# Altium PCB main.PcbDoc (part 1 of 2)
Units mm, origin at the board's own origin, x right, y up, seen from the top; angles counter-clockwise.
Board outline 137 x 49 mm, 4 copper layers (Top Layer, Layer 1, Layer 2, Bottom Layer), stack 0.569 mm thick; 68 components, 75 nets, 388 pads, 316 vias.
Unrouted connection lines stored in the file: 6.
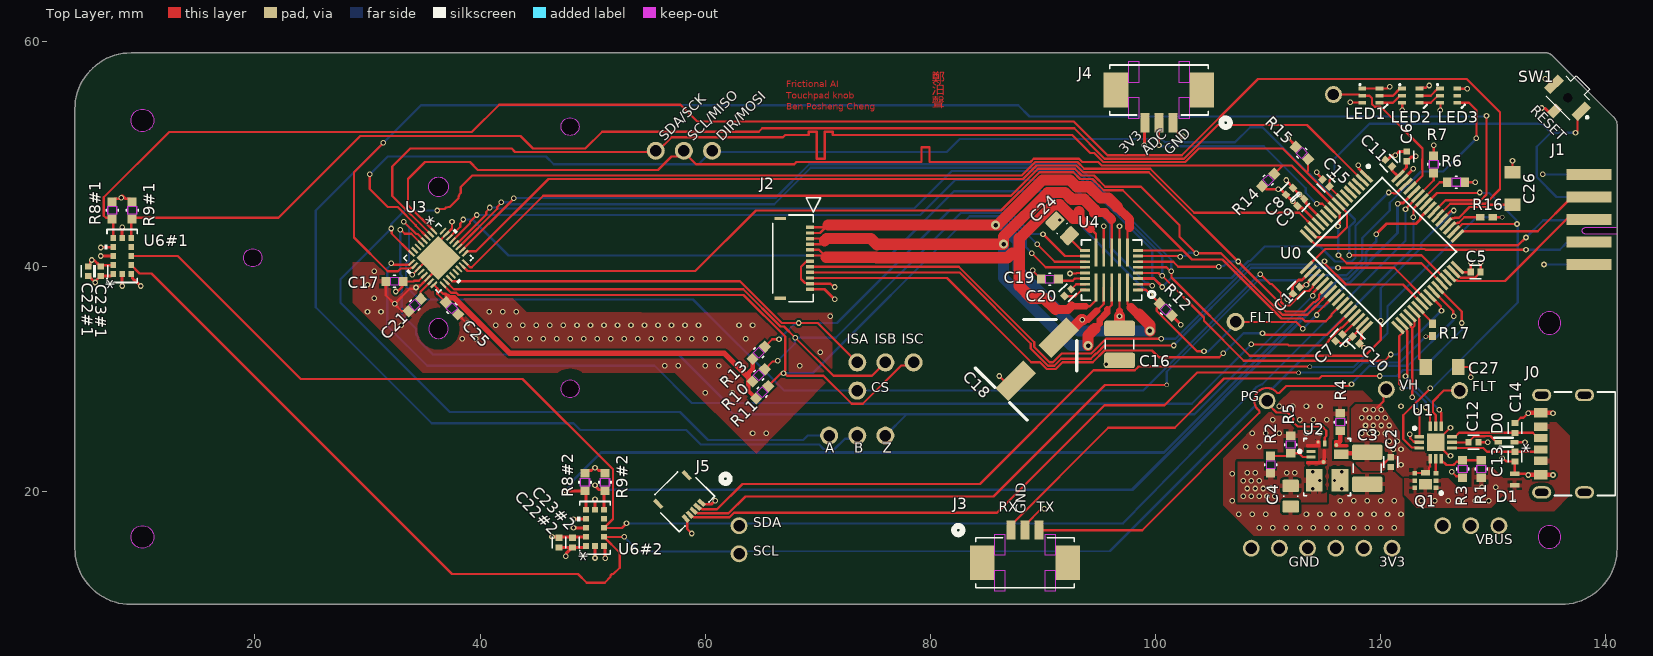
[diagram p0: Top Layer view]
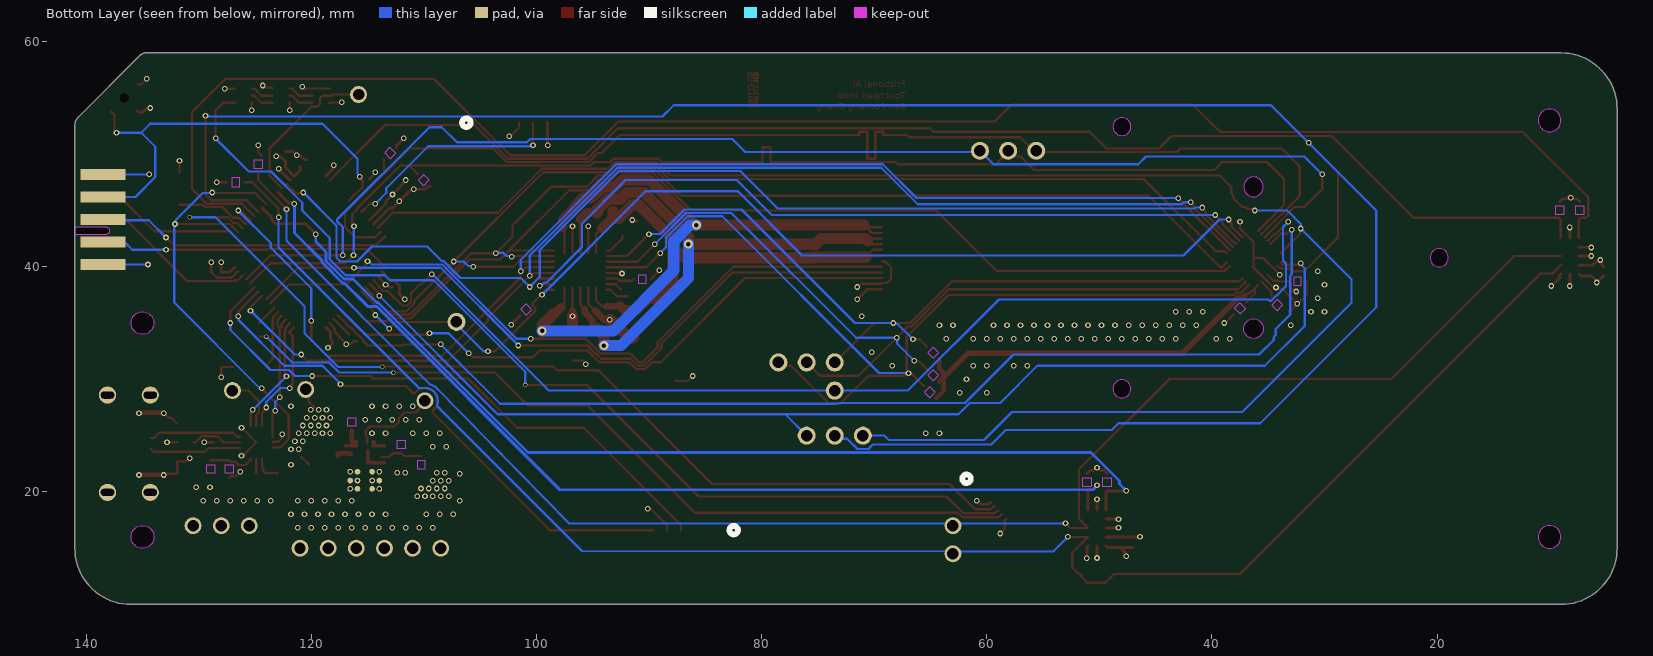
[diagram p1: Bottom Layer view, seen from below]
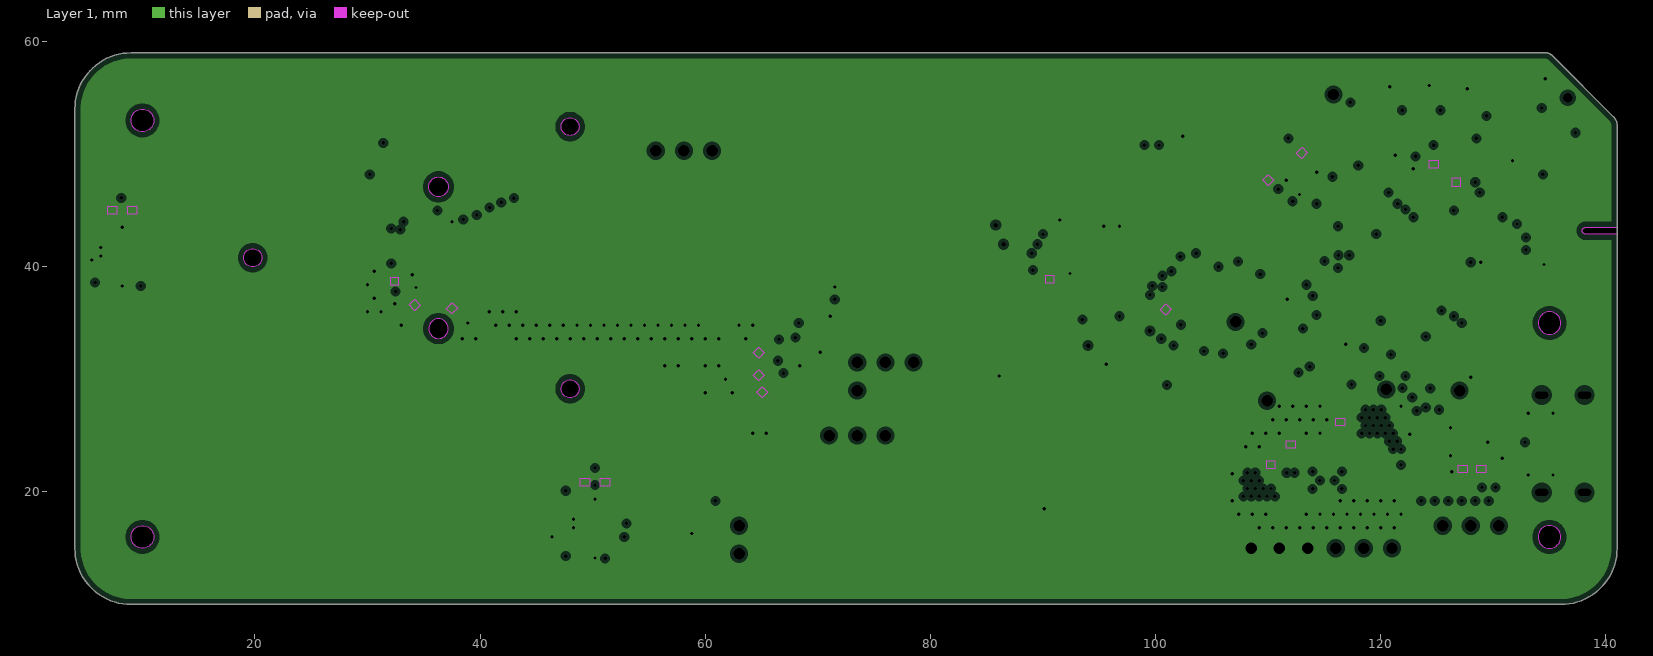
[diagram p2: Layer 1, clearances drawn from the general rule]
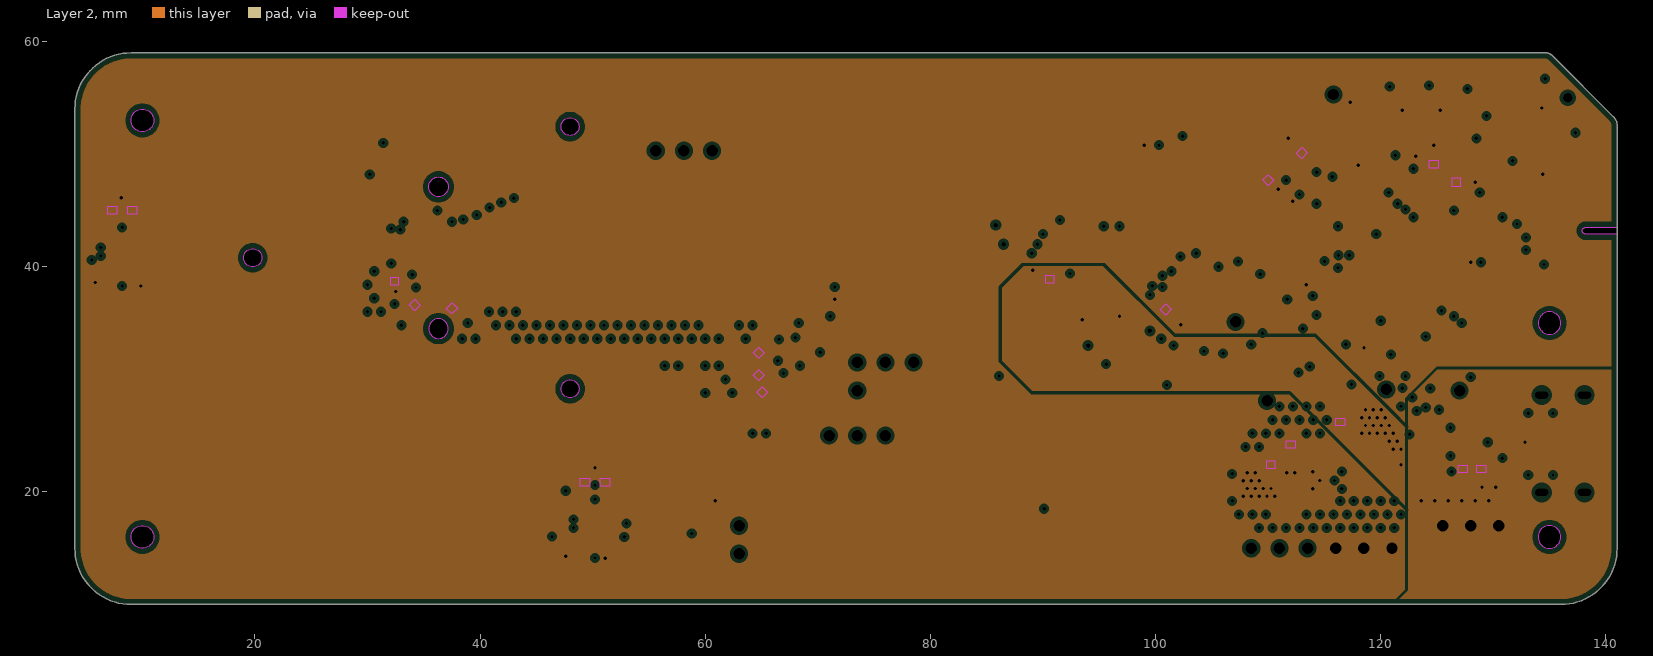
[diagram p3: Layer 2, clearances drawn from the general rule]
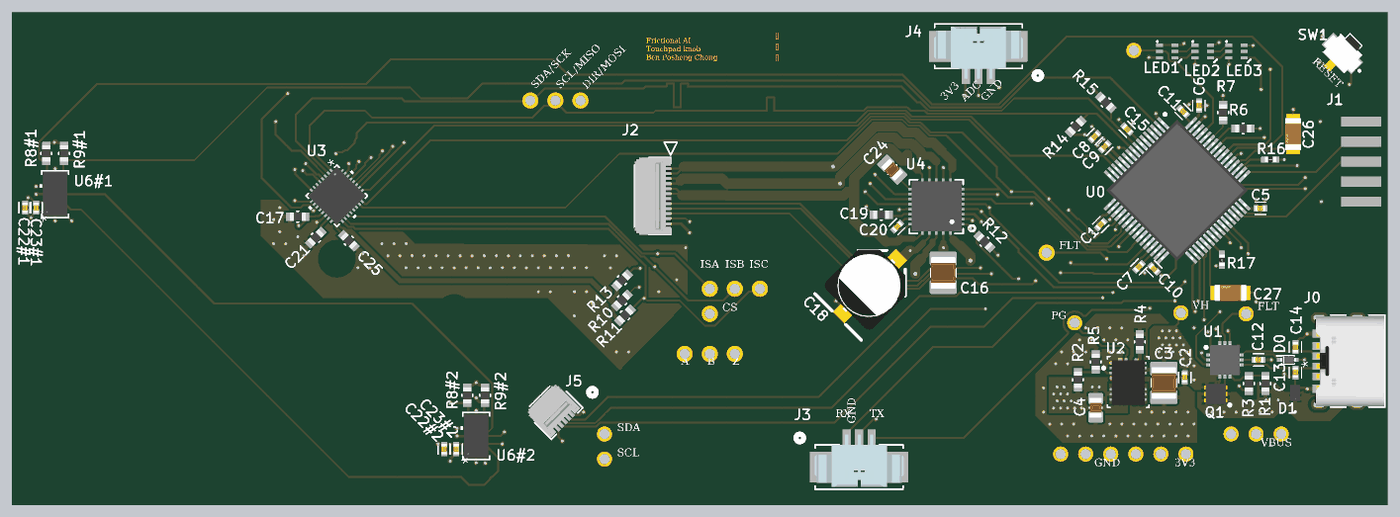
[diagram p5: 3D render of the assembled board from above, using the file's embedded part models]

## Layer stack, top to bottom
Top Solder: solder mask 0.0102, Solder Resist, Dk 3.5
Top Layer: signal copper 0.0356
Dielectric 2: prepreg 0.0711, PP-006, Dk 4.1
Layer 1: plane copper 0.018, net GND
Dielectric 1: dielectric 0.32, FR-4, Dk 4.8
Layer 2: plane copper 0.018, net (Multiple Nets)
Dielectric 5: prepreg 0.0711, PP-006, Dk 4.1
Bottom Layer: signal copper 0.0356
Bottom Solder: solder mask 0.0102, Solder Resist, Dk 3.5

## Board outline
9,10 136,10 ccw(c136,15) 141,15 141,52.559 ccw(c139.934,52.559) 140.688,53.312 135.241,58.759 ccw(c134.659,58.176) 134.659,59 9,59 ccw(c9,54) 4,54 4,15 ccw(c9,15)
cut-out: 36.3,46.225 cw(c36.3,47.1) 35.425,47.1 cw(c36.3,47.1) 36.3,47.975 cw(c36.3,47.1) 37.175,47.1 cw(c36.3,47.1)
cut-out: 35.425,34.5 ccw(c36.3,34.5) 36.3,33.625 ccw(c36.3,34.5) 37.175,34.5 ccw(c36.3,34.5) 36.3,35.375 ccw(c36.3,34.5)
cut-out: 10,52 cw(c10,53) 9,53 cw(c10,53) 10,54 cw(c10,53) 11,53 cw(c10,53)
cut-out: 10,15 cw(c10,16) 9,16 cw(c10,16) 10,17 cw(c10,16) 11,16 cw(c10,16)
cut-out: 133.981,15.996 ccw(c134.986,15.996) 134.986,14.991 ccw(c134.986,15.996) 135.991,15.996 ccw(c134.986,15.996) 134.986,17.001 ccw(c134.986,15.996)
cut-out: 134,35 ccw(c135,35) 135,34 ccw(c135,35) 136,35 ccw(c135,35) 135,36 ccw(c135,35)
cut-out: 47.992,28.358 cw(c47.992,29.158) 47.192,29.158 cw(c47.992,29.158) 47.992,29.958 cw(c47.992,29.158) 48.792,29.158 cw(c47.992,29.158)
cut-out: 19.8,40 cw(c19.8,40.8) 19,40.8 cw(c19.8,40.8) 19.8,41.6 cw(c19.8,40.8) 20.6,40.8 cw(c19.8,40.8)
cut-out: 47.988,51.649 cw(c47.988,52.449) 47.188,52.449 cw(c47.988,52.449) 47.988,53.249 cw(c47.988,52.449) 48.788,52.449 cw(c47.988,52.449)

## Design rules (kind name [scope] priority, off if disabled: settings)
BoardOutlineClearance [All] p1: gap=1 ignorepadtopadclearanceinfootprint=FALSE
Clearance [All] p1: gap=0.2 ignorepadtopadclearanceinfootprint=TRUE except(0.1: Track-Track Track-SMDPad; 0.15: SMDPad-SMDPad; 0.28: Track-THPad Track-Hole; 0.3: THPad-Fill THPad-Poly THPad-Region; 0.45: THPad-THPad)
HoleSize [All] p1: absolutevalues=TRUE maxlimit=6.3 minlimit=0.15 maxpercent=80.000 minpercent=20.000
MatchedLengths I2C2 [InNetClass('i2c2')] p1: tolerance=8 checknetsindiffpair=FALSE checkdiffpairvsdiffpair=TRUE checkxsignals=TRUE checkothers=TRUE
MatchedLengths I2C3 [InNetClass('i2c3/spi1')] p2: tolerance=8 checknetsindiffpair=FALSE checkdiffpairvsdiffpair=TRUE checkxsignals=TRUE checkothers=TRUE
MatchedLengths USART [InNetClass('usart')] p3: tolerance=8 checknetsindiffpair=FALSE checkdiffpairvsdiffpair=TRUE checkxsignals=TRUE checkothers=TRUE
MinimumAnnularRing [not isvia] p1: minimumring=0.2
MinimumSolderMaskSliver [All] p1: minsoldermaskwidth=0.1
PlaneClearance [All] p1: clearance=0.3
PlaneConnect [All] p1: pad.planeconnectstyle=Relief pad.reliefexpansion=0.2 pad.reliefentries=4 pad.reliefconductorwidth=0.3 pad.reliefairgap=0.3 via.planeconnectstyle=Direct via.reliefexpansion=0.508 via.reliefentries=4 via.reliefconductorwidth=0.254 via.reliefairgap=0.254
PolygonConnect PolygonConnect_PWR [InNet('VBUS') or InNet('VH') or InNet('GND')] p1: thpad.connectstyle=Relief thpad.reliefconductorwidth=0.254 thpad.reliefentries=4 thpad.polygonreliefangle="90 Angle" thpad.airgapwidth=0.254 smdpad.connectstyle=Relief smdpad.reliefconductorwidth=0.4 smdpad.reliefentries=4 smdpad.polygonreliefangle="90 Angle" smdpad.airgapwidth=0.2 via.connectstyle=Direct via.reliefconductorwidth=0.254 via.reliefentries=4 via.polygonreliefangle="90 Angle" via.airgapwidth=0.254
PolygonConnect PolygonConnect_3V3 [InNet('3V3')] p2: thpad.connectstyle=Relief thpad.reliefconductorwidth=0.254 thpad.reliefentries=4 thpad.polygonreliefangle="90 Angle" thpad.airgapwidth=0.254 smdpad.connectstyle=Relief smdpad.reliefconductorwidth=0.45 smdpad.reliefentries=4 smdpad.polygonreliefangle="45 Angle" smdpad.airgapwidth=0.2 smdpad.conductorbypadedge=TRUE smdpad.mindistance=0.381 smdpad.enablemindistance=FALSE via.connectstyle=Direct via.reliefconductorwidth=0.254 via.reliefentries=4 via.polygonreliefangle="90 Angle" via.airgapwidth=0.254
PolygonConnect [All] p3: thpad.connectstyle=Relief thpad.reliefconductorwidth=0.254 thpad.reliefentries=4 thpad.polygonreliefangle="90 Angle" thpad.airgapwidth=0.254 smdpad.connectstyle=Relief smdpad.reliefconductorwidth=0.254 smdpad.reliefentries=4 smdpad.polygonreliefangle="90 Angle" smdpad.airgapwidth=0.254 smdpad.conductorbypadedge=TRUE smdpad.mindistance=0.381 smdpad.enablemindistance=FALSE via.connectstyle=Direct via.reliefconductorwidth=0.254 via.reliefentries=4 via.polygonreliefangle="90 Angle" via.airgapwidth=0.254
RoomDefinition bldc [InComponentClass('bldc')] p1: confinementstyle=ConfineIn formatcopy=TRUE lockcomponents=FALSE outline 30.66,37.709 30.66,39.691 31.535,39.691 31.535,45.544 64.413,45.544 64.413,46.454 108.069,46.454 108.069,49.631 111.069,49.631 111.069,52.031 114.931,52.031 114.931,48.169 111.931,48.169 111.931,45.769 102.831,45.769 102.831,34.269 98.689,34.269 98.689,30.466 95.365,30.466 95.365,25.81 83.411,25.81 83.411,26.921 63.118,26.921 63.118,28.421 62.818,28.421 62.818,34.369 35.569,34.369 35.569,34.669 32.269,34.669 32.269,36.389 31.535,36.389 31.535,37.709
RoomDefinition power [InComponentClass('power')] p2: confinementstyle=ConfineIn formatcopy=TRUE lockcomponents=FALSE outline 106.8,15.7 141.732,15.7 141.732,59.817 106.8,59.817
RoomDefinition TOF1 [InComponentClass('TOF1')] p3: confinementstyle=ConfineIn formatcopy=TRUE lockcomponents=FALSE outline 6.295,36.126 10.105,36.126 10.105,46.794 6.295,46.794
RoomDefinition TOF2 [InComponentClass('TOF2')] p4: confinementstyle=ConfineIn formatcopy=TRUE lockcomponents=FALSE outline 48.295,11.974 52.105,11.974 52.105,22.642 48.295,22.642
RoutingVias [All] p1: holewidth=0.3 width=0.5 viastyle="Through Hole" minholewidth=0.15 minwidth=0.25 maxholewidth=0.711 maxwidth=1.27
SilkToSilkClearance [All] p1: silktosilkclearance=0
SilkToSolderMaskClearance [IsPad] p1: minsilkscreentomaskgap=0.15 clearancetoexposedcopper=FALSE
SolderMaskExpansion SolderMaskExpansionVia [IsVia] p1: expansion=0 istentingtop=TRUE
SolderMaskExpansion [All] p2: expansion=0 istentingtop=FALSE
SupplyNets "Schematic Supply Nets_3" [InNet('3V3')] p1: voltage=0.000
SupplyNets "Schematic Supply Nets_2" [InNet('VH')] p2: voltage=0.000
SupplyNets "Schematic Supply Nets_1" [InNet('VBUS')] p3: voltage=0.000
SupplyNets "Schematic Supply Nets" [InNet('GND')] p4: voltage=0.000
Width [All] p1: maxlimit=1 minlimit=0.1 preferedwidth=0.2
24 further rules are at their usual default settings.

## Classes and differential pairs
net class i2c3/spi1: MOSI SCL/SCK SDA/MISO
net class i2c2: SCL SDA
net class usart: RX TX
channel class tof: tof1 tof2
component class tof2: C22#2 C23#2 R8#2 R9#2 U6#2
component class tof1: C22#1 C23#1 R8#1 R9#1 U6#1
component class main: C26 C27 J3 J4 J5 R6 R7 R16 R17 U0
component class POWER: C1 C2 C3 C4 C5 C6 C7 C8 C9 C10 C11 C12 C13 C14 C15 D0 D1 J0 J1 LED1 LED2 LED3 Q1 R1 R2 R3 R4 R5 SW1 U1
component class bldc: C16 C17 C18 C19 C20 C21 C24 C25 J2 R10 R11 R12 R13 R14 R15 U3 U4

## Components (designator, comment, footprint, x,y, rotation, side; value= is the part's Value field where it differs from the comment)
C1 "100n" CAPC1005X55N 112.5,37.9 r45 top locked
C2 "100n" CAPC1005X55N 120.879,22.649 r90 top
C3 "10u" CAPC3225X270N 118.8,22.1 r90 top
C4 "47u" CAPC2012X145N 111.999,19.623 r90 top
C5 "100n" CAPC1005X55N 128.423,39.53 r180 top
C6 "100n" CAPC1005X55N 122.3,49.8 r270 top
C7 "4.7u" CAPC1005X55N 116.299,33.693 r45 top
C8 "100n" CAPC1005X55N 111.9,46.7 r225 top
C9 "1u" CAPC1005X55N 112.9,45.7 r225 top
C10 "100n" CAPC1005X55N 117.8,33.5 r315 top
C11 "10u" CAPC1005X55N 120.704,49.196 r315 top
C12 "100n" CAPC1005X55N 128.237,24.407 r180 top
C13 "330p" CAPC1005X55N 131.92,23.137 r90 top
C14 "330p" CAPC1005X55N 131.92,25.677 r270 top
C15 "100n" CAPC1005X55N 115.132,47.432 r315 top
C16 "22u" CAPC3225X270N 96.8,33.1 r270 top
C17 "1u" RC0603N_YAG 32.4,38.7 r0 top
C18 "100u" NICHICON63 85.779,29.21 r315 top
C19 "1u" RC0603N_YAG 90.6,38.9 r180 top
C20 "100n" CAPC1005X55N 92.2,37.7 r45 top
C21 "1u" RC0603N_YAG 34.2,36.6 r45 top
C22#1 "4.7u" CAPC1005X55N 5.2,39.6 r270 top (schematic designator C22)
C22#2 "4.7u" CAPC1005X55N 47,15.5 r270 top (schematic designator C22)
C23#1 "100n" CAPC1005X55N 6.3,39.6 r270 top (schematic designator C23)
C23#2 "100n" CAPC1005X55N 48.2,15.5 r270 top (schematic designator C23)
C24 "4.7u" CAPC2012X145N 91.7,43.4 r135 top
C25 "1u" RC0603N_YAG 37.5,36.3 r135 top
C26 "47n" 3216M/1206 131,48.95 r270 top
C27 "47n" 3216M/1206 127.45,31.8 r180 top
D0 "BAT54KFILM" SODFL1608X70N 131.158,24.407 r0 top
D1 "ESDA25P35-1U1M" QFN1610_STM 131.9,21.1 r90 top
J0 "2171750001" 2171750001_MOL 137.254,24.28 r90 top
J1 "STLINKV3MINIE" 009159010061911 135,49.2 r270 top
J2 "5034801200" CON_5034801200_MOL 67.8,40.75 r270 top
J3 "532610371" CONN_532610001-SD_03_MOL 88.4,13.7 r180 top
J4 "532610371" CONN_532610001-SD_03_MOL 100.3,55.7 r0 top
J5 "5034800540" CONN_503480-0540_MOL 57.9,19.4 r225 top
LED1 "WS2816A-2121" WS2816A-2121 118.01,52.83 r0 top
LED2 "WS2816A-2121" WS2816A-2121 121.55,52.83 r0 top
LED3 "WS2816A-2121" WS2816A-2121 124.91,52.83 r0 top
Q1 "DMT35M4LFDF" "U-DFN2020-6 (TYPE F)" 125.11,20.15 r90 top
R1 "10k" RC0603N_YAG 128.928,22.036 r90 top
R2 "45.3k" RC0603N_YAG 110.221,22.417 r90 top
R3 "475" RC0603N_YAG 127.277,22.036 r270 top
R4 "18k" RC0603N_YAG 116.4,26.2 r90 top
R5 "10k" RC0603N_YAG 112,24.2 r90 top
R6 "1.5k" RC0603N_YAG 126.7,47.5 r180 top
R7 "1.5k" RC0603N_YAG 124.7,49.1 r270 top
R8#1 "10k" RC0603N_YAG 7.311,45.016 r270 top (schematic designator R8)
R8#2 "10k" RC0603N_YAG 49.311,20.864 r270 top (schematic designator R8)
R9#1 "10k" RC0603N_YAG 9.089,45.016 r270 top (schematic designator R9)
R9#2 "10k" RC0603N_YAG 51.089,20.864 r270 top (schematic designator R9)
R10 "2.15k" RC0603N_YAG 64.749,30.351 r225 top
R11 "2.15k" RC0603N_YAG 65.049,28.851 r225 top
R12 "1.5k" RC0603N_YAG 100.9,36.2 r135 top
R13 "2.15k" RC0603N_YAG 64.749,32.351 r225 top
R14 "1.5k" RC0603N_YAG 110,47.7 r45 top
R15 "1.5k" RC0603N_YAG 113,50.1 r315 top
R16 "10k" RESC1005X35N 129.4,44.4 r180 top
R17 "10k" RESC1005X35N 124.6,34.4 r90 top
SW1 "B3U-3100P-B" B3U3000PB 136.598,55.002 r315 top
U0 "STM32U575RGT3" QFP50P1200X1200X160-64N 120.124,41.329 r315 top locked
U1 "TCPP01-M12" QFN50P300X300X100-13N-D 124.882,24.399 r0 top
U2 "TPSM84338RCJR" ? 115.245,22.121 r0 top
U3 "MP6570GR-xxxx-P" QFN-32_MP6570_MNP 36.297,40.783 r315 top
U4 "MP6540GU-P" QFN-5x5_MP6540_MNP 96.1,39.7 r180 top
U6#1 "VL53L0CXV0DH/1" LGA12_STM 8.2,40.952 r90 top (schematic designator U6)
U6#2 "VL53L0CXV0DH/1" LGA12_STM 50.2,16.8 r90 top (schematic designator U6)

## Footprints (in the part's own frame and the unit in brackets; to place one, negate y for a bottom-side part, rotate by r counter-clockwise, add the part's x,y. Pads: shape width x height; smd on the part's side, far side on the other; paste and mask are expansions set on the pad)
3216M/1206 [mm]
  rect 1.1x1.4 / inner round 0 / far side round 0 all layers, no hole: 1(0.55,0.7) 2(3.45,0.7)
  body extent 0.4,-0.1 3.6,1.5, height 0.95
2171750001_MOL [mil]
  oval 43x67 / inner oval 43x67 / far side round 60 hole 47 slot 24 at 0 deg paste-99999 mask-33.5: 7(-170.08,116.31) 8(170.08,116.31) 9(-170.08,-33.29) 10(170.08,-33.29)
  rect 28x47 smd paste+0 mask+0: A5(-19.68,119.46) B5(19.69,119.46)
  rect 30x47 smd paste+0 mask+0: A9(59.84,119.46) B9(-59.84,119.46)
  rect 32x47 smd paste+0 mask+0: A12(108.27,119.46) B12(-108.27,119.46)
  silkscreen extent -181,-141 181,71, body extent -176,-139 176,133, height 125
009159010061911 [mm]
  rect 1x4 smd: 1(9,3.5) 2(7,3.5) 3(5,3.5) 4(3,3.5) 5(1,3.5)
  rect 1x4 smd far side: 6(9,3.5) 7(7,3.5) 8(5,3.5) 9(3,3.5) 10(1,3.5)
  Keep-Out Layer board cut-out: 5.7,6 6.3,6 6.3,3.2 6.27,3.07 6.187,2.965 6.067,2.908 5.933,2.908 5.813,2.965 5.73,3.07 5.7,3.2 5.7,3.2
B3U3000PB [mm]
  rect 0.8x1.7 smd: 1(1.7,0) 2(-1.7,0)
  rect 0.8x1.1 / inner round 0 / far side round 0 all layers, no hole: 3(0,-1.65)
  round 0.425 hole 0.85 unplated: 4(0,0)
  silkscreen extent -1.5,-1.25 2.55,1.95, body extent -1.97,-1.3 2.03,1.91, height 1.2
CAPC1005X55N [mm]
  rect 0.54x0.6 smd: 1(-0.43,0) 2(0.43,0)
  silkscreen extent -0.53,-0.62 0.53,0.62, body extent -0.51,-0.28 0.54,0.28, height 0.56
CAPC2012X145N [mm]
  rrect25% 1.1x1.48 smd: 1(-0.915,0) 2(0.915,0)
  silkscreen extent -0.05,-0.63 0.05,0.63, body extent -1,-0.63 1,0.63, height 1.45
CAPC3225X270N [mm]
  rrect25% 1.37x2.72 smd: 1(-1.42,0) 2(1.42,0)
  silkscreen extent -0.42,-1.25 0.42,1.25, body extent -1.6,-1.25 1.6,1.25, height 2.7
CON_5034801200_MOL [mm]
  rect 0.3x0.7 smd paste+0 mask+0.076: 1(-2.75,1.5) 2(-2.25,1.5) 3(-1.75,1.5) 4(-1.25,1.5) 5(-0.75,1.5) 6(-0.25,1.5) 7(0.25,1.5) 8(0.75,1.5) 9(1.25,1.5) 10(1.75,1.5) 11(2.25,1.5) 12(2.75,1.5)
  rect 0.3x1 smd paste+0 mask+0.076: P1(-3.54,-1.15) P2(3.54,-1.15)
  silkscreen extent -5.37,-1.8 3.85,2.43, body extent -3.85,-1.78 3.85,1.82, height 1.85
CONN_503480-0540_MOL [mil]
  rect 14x30 smd paste+0 mask+0: 1(-39.37,59.19) 2(-19.69,59.19) 3(0,59.19) 4(19.69,59.19) 5(39.37,59.19)
  rect 14x41 smd: 6(-70.47,-45.14) 7(70.47,-45.14)
  silkscreen extent -172,-76 88,76, body extent -80,-71 85,71, height 73
CONN_532610001-SD_03_MOL [mil]
  rect 32x67 smd paste+0 mask+0: 1(49.21,-114.35) 2(0,-114.35) 3(-49.21,-114.35)
  rect 87x122 smd paste+0 mask+0: 4(-149.61,-0.18) 5(149.61,-0.18)
  Top Layer keep-out region: 108.08,-27.67 69.08,-27.67 69.08,-98.67 108.08,-98.67
  Top Layer keep-out region: -69.08,-27.67 -108.08,-27.67 -108.08,-98.67 -69.08,-98.67
  Top Layer keep-out region: 108.08,98.32 69.08,98.32 69.08,27.31 108.08,27.31
  Top Layer keep-out region: -69.08,98.31 -108.08,98.31 -108.08,27.31 -69.08,27.31
  silkscreen extent -172,-129 248,88, body extent -175,-127 175,77, height 126
LGA12_STM [mm]
  rect 0.5x0.5 smd paste+0 mask+0: 1(-1.6,0.8) 2(-0.8,0.8) 3(0,0.8) 4(0.8,0.8) 5(1.6,0.8) 6(1.6,0) 7(1.6,-0.8) 8(0.8,-0.8) 9(0,-0.8) 10(-0.8,-0.8) 11(-1.6,-0.8) 12(-1.6,0)
  silkscreen extent -2.35,-1.35 2.35,1.56, body extent -2.22,-1.22 2.22,1.22, height 1.04
NICHICON63 [mm]
  rect 1.6x3.5 / inner rect 0x0 / far side rect 0x0 all layers, no hole: 1(0.8,1.75) 2(0.8,7.15)
  silkscreen extent -2.54,0 4,8.13, body extent -2.6,0.9 4,7.9, height 5.67
QFN50P300X300X100-13N-D [mm]
  rect 0.85x0.3 smd: 1(-1.45,0.5) 2(-1.45,0) 3(-1.45,-0.5) 7(1.45,-0.5) 8(1.45,0) 9(1.45,0.5)
  rect 0.3x0.85 smd: 4(-0.5,-1.45) 5(0,-1.45) 6(0.5,-1.45) 10(0.5,1.45) 11(0,1.45) 12(-0.5,1.45)
  rect 1.55x1.55 smd: 13(0,0)
  silkscreen extent -2,1.13 -1.75,1.37, body extent -1.55,-1.55 1.55,1.55, height 1
QFN1610_STM [mil]
  rect 16x33 smd paste+0 mask+0: 1(-20.5,0) 2(20.5,0)
  silkscreen extent -77,-3 -71,3, body extent -31,-19 31,19, height 24
QFN-5x5_MP6540_MNP [mil]
  rect 35x10 smd paste+0 mask+0: 1(-92.52,68.92) 2(-92.52,49.22) 3(-92.52,29.53) 4(-92.52,9.85) 5(-92.52,-9.85) 6(-92.52,-29.54) 7(-92.52,-49.23) 8(-92.52,-68.92) 14(92.52,-68.92) 15(92.52,-49.23) 16(92.52,-29.54) 17(92.52,-9.85) 18(92.52,9.85) 19(92.52,29.53) 20(92.52,49.22) 21(92.52,68.92)
  rect 10x98 smd paste+0 mask+0: 9(-55.13,-61.02) 10(-27.56,-61.02) 11(0,-61.02) 12(27.56,-61.02) 13(55.13,-61.02) 22(55.13,61.02) 23(27.56,61.02) 24(0,61.02) 25(-27.56,61.02) 26(-55.13,61.02)
  silkscreen extent -151,-106 106,106, body extent -100,-100 97,97, height 30
QFN-32_MP6570_MNP [mm]
  rect 0.75x0.204 smd paste+0 mask+0: 1(-1.97,1.4) 2(-1.97,1) 3(-1.97,0.6) 4(-1.97,0.2) 5(-1.97,-0.2) 6(-1.97,-0.6) 7(-1.97,-1) 8(-1.97,-1.4) 17(1.97,-1.4) 18(1.97,-1) 19(1.97,-0.6) 20(1.97,-0.2) 21(1.97,0.2) 22(1.97,0.6) 23(1.97,1) 24(1.97,1.4)
  rect 0.204x0.75 smd paste+0 mask+0: 9(-1.4,-1.97) 10(-1,-1.97) 11(-0.6,-1.97) 12(-0.2,-1.97) 13(0.2,-1.97) 14(0.6,-1.97) 15(1,-1.97) 16(1.4,-1.97) 25(1.4,1.97) 26(1,1.97) 27(0.6,1.97) 28(0.2,1.97) 29(-0.2,1.97) 30(-0.6,1.97) 31(-1,1.97) 32(-1.4,1.97)
  rect 2.794x2.794 smd paste-1.397 mask+0: 33(0,0)
  silkscreen extent -2.17,-2.85 2.85,2.85, body extent -2.05,-2.05 2.05,2.05, height 1
QFP50P1200X1200X160-64N [mm]
  rect 1.475x0.3 smd: 1(-5.738,3.75) 2(-5.738,3.25) 3(-5.738,2.75) 4(-5.738,2.25) 5(-5.738,1.75) 6(-5.738,1.25) 7(-5.738,0.75) 8(-5.738,0.25) 9(-5.738,-0.25) 10(-5.738,-0.75) 11(-5.738,-1.25) 12(-5.738,-1.75) 13(-5.738,-2.25) 14(-5.738,-2.75) 15(-5.738,-3.25) 16(-5.738,-3.75) 33(5.738,-3.75) 34(5.738,-3.25) 35(5.738,-2.75) 36(5.738,-2.25) 37(5.738,-1.75) 38(5.738,-1.25) 39(5.738,-0.75) 40(5.738,-0.25) 41(5.738,0.25) 42(5.738,0.75) 43(5.738,1.25) 44(5.738,1.75) 45(5.738,2.25) 46(5.738,2.75) 47(5.738,3.25) 48(5.738,3.75)
  rect 0.3x1.475 smd: 17(-3.75,-5.738) 18(-3.25,-5.738) 19(-2.75,-5.738) 20(-2.25,-5.738) 21(-1.75,-5.738) 22(-1.25,-5.738) 23(-0.75,-5.738) 24(-0.25,-5.738) 25(0.25,-5.738) 26(0.75,-5.738) 27(1.25,-5.738) 28(1.75,-5.738) 29(2.25,-5.738) 30(2.75,-5.738) 31(3.25,-5.738) 32(3.75,-5.738) 49(3.75,5.738) 50(3.25,5.738) 51(2.75,5.738) 52(2.25,5.738) 53(1.75,5.738) 54(1.25,5.738) 55(0.75,5.738) 56(0.25,5.738) 57(-0.25,5.738) 58(-0.75,5.738) 59(-1.25,5.738) 60(-1.75,5.738) 61(-2.25,5.738) 62(-2.75,5.738) 63(-3.25,5.738) 64(-3.75,5.738)
  silkscreen extent -6.35,-4.65 4.65,4.65, body extent -6,-6 6,6, height 1.6
RC0603N_YAG [mil]
  rect 30x32 smd paste+0 mask+0: 1(-30.5,0) 2(30.5,0)
  Top Layer keep-out region: -13.5,-14 -13.5,14 13.5,14 13.5,-14
  Keep-Out Layer region: -13.5,-14 -13.5,14 13.5,14 13.5,-14
  silkscreen extent -3,-21 3,21, body extent -31,-16 31,16, height 28
RESC1005X35N [mm]
  rect 0.75x0.6 smd: 1(-0.55,0) 2(0.55,0)
  body extent -0.59,-0.28 0.51,0.27, height 0.34
SODFL1608X70N [mm]
  rect 0.7x0.42 smd: 1(-0.725,0) 2(0.725,0)
  silkscreen extent -1.07,-0.4 0.6,0.4, body extent -0.76,-0.4 0.84,0.4, height 0.7
"U-DFN2020-6 (TYPE F)" [mm]
  rect 0.4x0.425 / inner rect 0x0 / far side rect 0x0 all layers, no hole: D(0.2,2.09) D(0.2,0.21) D(0.85,2.09) D(0.85,0.21) G(1.5,0.21) S(1.5,2.09)
  rect 0.95x1.15 / inner rect 0x0 / far side rect 0x0 all layers, no hole mask+0: D(0.52,1.15)
  rect 0.48x0.8 / inner rect 0x0 / far side rect 0x0 all layers, no hole: S(1.54,1.15)
  silkscreen extent -0.38,-0.38 -0.13,-0.13, body extent -0.15,0.15 1.85,2.15, height 0.6
WS2816A-2121 [mm]
  rect 0.7x0.32 smd: 1(0.35,3) 2(0.35,2.37) 3(0.35,1.74) 4(1.89,1.74) 5(1.89,2.37) 6(1.89,3)
  silkscreen extent 0.12,1.27 2.56,3.37
? [mm]
  rect 0.8x0.25 smd paste+0 mask-0.381: 1(-1.45,1.475) 2(-1.45,0.975)
  round 0.348 smd paste-0.161 mask-0.165: 3(-0.319,0.532)
  round 0.5 / inner round 1.524 / far side round 0.5 hole 0.3 paste-2539.97 mask-0.241: 4(-1.3,-1.85) 4(-1.3,-0.325) 4(-0.65,-1.113) 5(0.65,-1.113) 5(1.3,-1.85) 5(1.3,-0.325)
  round 0.5 / inner round 1.524 / far side round 0.5 all layers, no hole paste-2539.97 mask-0.241: 4(-1.3,-1.113) 4(-0.65,-1.85) 4(-0.65,-0.325) 5(0.65,-1.85) 5(0.65,-0.325) 5(1.3,-1.113)
  rect 1.5x2.025 smd paste-1 mask-1.003: 4(-1.15,-1.088) 5(1.15,-1.088)
  rect 1.3x0.85 smd paste-0.637 mask-0.635: 6(1.25,1.225)
  round 0.337 smd paste+0 mask-0.152: 7(0.812,2.037)
  rect 0.3x0.55 smd paste+0 mask-0.267: 8(-0.225,2.175)
  round 0.27 smd paste+0 mask-0.127: 9(-0.8,2.3)
  Top Layer region: 0.675,1.85 1.8,1.85 1.85,1.9 1.85,2.05 1.8,2.1 1.075,2.1 0.975,2.2 0.975,2.4 0.925,2.45 0.675,2.45 0.625,2.4 0.625,1.9
  Top Layer region: -0.675,1.85 -1.8,1.85 -1.85,1.9 -1.85,2.05 -1.8,2.1 -1.075,2.1 -0.975,2.2 -0.975,2.4 -0.925,2.45 -0.675,2.45 -0.625,2.4 -0.625,1.9
  Top Layer region: -0.175,0.326 -1.8,0.325 -1.85,0.375 -1.85,0.55 -1.8,0.6 -0.606,0.6 -0.536,0.63 -0.404,0.761 -0.375,0.832 -0.375,1.6 -0.325,1.65 -0.175,1.65 -0.125,1.6 -0.125,0.376
  silkscreen extent -2.57,-2.47 2.07,2.63, body extent -1.65,-2.25 1.65,2.25, height 2.05

## Part data
C1 C2 C5 C6 C8 C10 C12 C15 C20 C23#1 C23#2: library part UMK105B7104KVHF, "CAP CER 0.1UF 50V X7R 0402", Package=None, Availability=Unavailable, Manufacturer_Part_Number=UMK105B7104KVHF, MF="{'manufacturer': u'Taiyo Yuden'}", MP=UMK105B7104KVHF, Price=None
C3: library part MSASU32MSB5106KPNA01, "CAP CER 10UF 50V X5R 1210", Package=None, Availability=Unavailable, Manufacturer_Part_Number=MSASU32MSB5106KPNA01, MF="{'manufacturer': u'Taiyo Yuden'}", MP=MSASU32MSB5106KPNA01, Price=None
C4: library part MSASL21GBB5476MTNA01, "CAP CER 47UF 10V X5R 0805", Package=None, Availability=Unavailable, Manufacturer_Part_Number=MSASL21GBB5476MTNA01, MF="{'manufacturer': u'Taiyo Yuden'}", MP=MSASL21GBB5476MTNA01, Price=None
C7 C22#1 C22#2: library part GRM155R60J475M, "CAP CER 4.7UF 6.3V X5R 0402", Package=None, Availability=Unavailable, Manufacturer_Part_Number=GRM155R60J475M, MF="{'manufacturer': u'Taiyo Yuden'}", MP=GRM155R60J475M, Price=None
C9: library part GRM155R60J105K, "CAP CER 1UF 6.3V X5R 0402", Package=None, Availability=Unavailable, Manufacturer_Part_Number=GRM155R60J105K, MF="{'manufacturer': u'Taiyo Yuden'}", MP=GRM155R60J105K, Price=None
C11: library part GRM155R60J106M, "CAP CER 10UF 6.3V X5R 0402", Package=None, Availability=Unavailable, Manufacturer_Part_Number=GRM155R60J106M, MF="{'manufacturer': u'Taiyo Yuden'}", MP=GRM155R60J106M, Price=None
C13 C14: library part MCASU105SCG331JFNA01, "CAP CER 330PF 50V C0G 0402", Package=None, Availability=Unavailable, Manufacturer_Part_Number=MCASU105SCG331JFNA01, MF="{'manufacturer': u'Taiyo Yuden'}", MP=MCASU105SCG331JFNA01, Price=None
C16: library part MSAST32MSB7226KPNB25, "CAP CER 22UF 25V X7R 1210", Package=None, Availability=Unavailable, Manufacturer_Part_Number=MSAST32MSB7226KPNB25, MF="{'manufacturer': u'Taiyo Yuden'}", MP=MSAST32MSB7226KPNB25, Price=None
C17 C19 C21 C25: library part EMK107B7105KA-T, "CAP CER 1UF 16V X7R 0603", Package=None, Availability=Unavailable, Manufacturer_Part_Number=EMK107B7105KA-T, MF="{'manufacturer': u'Taiyo Yuden'}", MP=EMK107B7105KA-T, Price=None
C18: library part UCM1V101MCL1GS, "100uF 35V", Manufacturer_Part_Number=UCM1V101MCL1GS
C24: library part EMK212B7475KG-T, "CAP CER 4.7UF 16V X7R 0805", Package=None, Availability=Unavailable, Manufacturer_Part_Number=EMK212B7475KG-T, MF="{'manufacturer': u'Taiyo Yuden'}", MP=EMK212B7475KG-T, Price=None
C26 C27: library part GRM3195C2A473GA, "CAP CER 47NF 100V C0G 1206", Package=None, Availability=Unavailable, Manufacturer_Part_Number=GRM3195C2A473GA, MF="{'manufacturer': u'Taiyo Yuden'}", MP=GRM3195C2A473GA, Price=None
D0: "BAT54KFILM, Schottky Diode,  0.3A max, 40V 5ns, 2-Pin, SOD-523", Manufacturer_Name=STMicroelectronics, Mouser Part Number=511-BAT54KFILM, Arrow Part Number=BAT54KFILM, Arrow Price/Stock=https://www.arrow.com/en/products/bat54kfilm/stmicroelectronics?region=europe, Datasheet Link=https://www.st.com/resource/en/datasheet/bat54.pdf, Geometry.Height=0.7mm, Manufacturer_Part_Number=BAT54KFILM, Mouser Price/Stock=https://www.mouser.co.uk/ProductDetail/STMicroelectronics/BAT54KFILM?qs=jZi1jxfVU95Y9ce6l3OT%252BA%3D%3D
D1: "35 A - 8/20 us, 22 V TVS in QFN-2L", Manufacturer_Name=STMicroelectronics, Copyright="Copyright (C) 2026 Ultra Librarian. All rights reserved.", Manufacturer_Part_Number=ESDA25P35-1U1M, RefDes=RefDes, Type=Type
J0: "Universal Serial Bus (USB) Shielded I/O Receptacle, Type C, Right-Angle,  Surface Mount, Top Mount, 6 Circuits, Gold (Au) Plating", Manufacturer_Name="Molex Connector Corporation", Copyright="Copyright (C) 2025 Ultra Librarian. All rights reserved.", Manufacturer_Part_Number=2171750001, RefDes=RefDes, Type=Type
J1: library part 009159010061911, "KYOCERA-AVX 009159010061911"
J2: "Easy-On FFC/FPC Connector, 0.50mm Pitch, FBH1 Series, Right-Angle, Dual Contact, 1.00mm Height, 12 Circuits, Gold over Nickel Plating", Manufacturer_Name="Molex Connector Corporation", Copyright="Copyright (C) 2026 Ultra Librarian. All rights reserved.", Manufacturer_Part_Number=5034801200, RefDes=RefDes, Type=Type
J3 J4: "1.25mm Pitch, PicoBlade PCB Header, Single Row, Right-Angle, Surface Mount, Tin (Sn) Plating, Friction Lock, 3 Circuits, Natural, Tape and Reel", Manufacturer_Name="Molex Connector Corporation", Copyright="Copyright (C) 2025 Ultra Librarian. All rights reserved.", Manufacturer_Part_Number=532610371, RefDes=RefDes, Type=Type
J5: "Easy-On FFC/FPC Connector, 0.50mm Pitch, FBH1 Series, Right-Angle, Dual Contact, 1.00mm Height, 5 Circuits, Gold over Nickel Plating", Manufacturer_Name="Molex Connector Corporation", Copyright="Copyright (C) 2025 Ultra Librarian. All rights reserved.", Manufacturer_Part_Number=5034800540, RefDes=RefDes, Type=Type
R1 R5 R8#1 R8#2 R9#1 R9#2: library part RT0603BRD0710KL, "10K OHM 0.1% 1/10W 0603", Manufacturer_Name=Yageo, Copyright="Copyright (C) 2026 Ultra Librarian. All rights reserved.", Manufacturer_Part_Number=RT0603BRD0710KL
R2: library part RT0603BRD0745K3L, "45.3K OHM 0.1% 1/10W 0603", Manufacturer_Name=Yageo, Copyright="Copyright (C) 2026 Ultra Librarian. All rights reserved.", Manufacturer_Part_Number=RT0603BRD0745K3L
R3: library part RT0603BRE07475RL, "475 OHM 0.1% 1/10W 0603", Manufacturer_Name=Yageo, Copyright="Copyright (C) 2026 Ultra Librarian. All rights reserved.", Manufacturer_Part_Number=RT0603BRE07475RL
R4: library part RT0603BRD0718KL, "18K OHM 0.1% 1/10W 0603", Manufacturer_Name=Yageo, Copyright="Copyright (C) 2026 Ultra Librarian. All rights reserved.", Manufacturer_Part_Number=RT0603BRD0718KL
R6 R7 R12 R14 R15: library part RC0603FR-071K5L, "1.5K OHM 1% 1/10W 0603", Manufacturer_Name=Yageo, Copyright="Copyright (C) 2026 Ultra Librarian. All rights reserved.", Manufacturer_Part_Number=RC0603FR-071K5L
R10 R11 R13: library part RT0603BRE072K15L, "2.15K OHM 0.1% 1/10W 0603", Manufacturer_Name=Yageo, Copyright="Copyright (C) 2026 Ultra Librarian. All rights reserved.", Manufacturer_Part_Number=RT0603BRE072K15L
R16 R17: library part RT0402BRD0710KL, "10K OHM 0.1% 1/10W 0402", Manufacturer_Name=Yageo, Copyright="Copyright (C) 2026 Ultra Librarian. All rights reserved.", Manufacturer_Part_Number=RT0402BRD0710KL
SW1: "OMRON - B3U-3100P-B - TACTILE SWITCH, SIDE ACTUATED, SMD", Arrow Part Number=B3U-3000P-B, Manufacturer_Name="OMRON Electronics", Mouser Part Number=653-B3U-3000P-B, Arrow Price/Stock=https://www.arrow.com/en/products/b3u-3000p-b/omron?utm_currency=USD&region=nac, Datasheet Link=https://componentsearchengine.com/Datasheets/2/B3U-3000P-B.pdf, Geometry.Height=1.35mm, Manufacturer_Part_Number=B3U-3100P-B, Mouser Price/Stock=https://www.mouser.co.uk/ProductDetail/Omron-Electronics/B3U-3000P-B?qs=AO7BQMcsEu4JAdtnbsGArA%3D%3D
U0: "Ultra-low-power Arm Cortex-M33 32-bit MCU+TrustZone+FPU, 240 DMIPS, up to 2 MB Flash memory, 786 KB SRAM", Manufacturer_Name=STMicroelectronics, Datasheet Link=https://www.st.com/resource/en/datasheet/stm32u575ag.pdf, Geometry.Height=1.6mm, Manufacturer_Part_Number=STM32U575RGT3
U1: "USB Type-C and power delivery protection for sink application", Manufacturer_Name=STMicroelectronics, Mouser Part Number=511-TCPP01-M12, Arrow Part Number=TCPP01-M12, Arrow Price/Stock=https://www.arrow.com/en/products/tcpp01-m12/stmicroelectronics.html?utm_currency=USD&region=europe, Datasheet Link=https://www.st.com/resource/en/datasheet/tcpp01-m12.pdf, Geometry.Height=1mm, Manufacturer_Part_Number=TCPP01-M12, Mouser Price/Stock=https://www.mouser.co.uk/ProductDetail/STMicroelectronics/TCPP01-M12?qs=%252B6g0mu59x7KCafIwapwG2A%3D%3D
U2: "3.8-V to 28-V Input, 3A, 200kHz-2.2MHz synchronous step-down power module 9-QFN-FCMOD -40 to 125", Manufacturer_Name="Texas Instruments", Copyright="Copyright (C) 2025 Ultra Librarian. All rights reserved.", Manufacturer_Part_Number=TPSM84338RCJR, RefDes=RefDes, Type=TYPE
U3: "3-Phase BLDC Controller with aHigh-Accuracy Angular Sensor", Manufacturer_Name="Monolithic Power Systems", Copyright="Copyright (C) 2026 Ultra Librarian. All rights reserved.", Manufacturer_Part_Number=MP6570GR-xxxx-P, RefDes=RefDes, Type=Type
U4: "35V 3A Three-Phase Power Stage", Manufacturer_Name="Monolithic Power Systems", Copyright="Copyright (C) 2025 Ultra Librarian. All rights reserved.", Manufacturer_Part_Number=MP6540GU-P, RefDes=RefDes, Type=Type
U6#1 U6#2: library part VL53L0CXV0DH1, "Time-of-Flight (ToF) ranging sensor", Manufacturer_Name=STMicroelectronics, Copyright="Copyright (C) 2026 Ultra Librarian. All rights reserved.", Manufacturer_Part_Number=VL53L0CXV0DH/1, RefDes=RefDes, Type=Type
LED1 LED2 LED3: Manufacturer_Part_Number=WS2816A-2121
Q1: Manufacturer_Part_Number=DMT35M4LFDF

## Free pads (board coordinates)
  round 1.5 hole 1.02: TP0(109.9,28.1) TP0(127,29) TP1(115.8,55.3) TP3(125.5,17) TP4(128,17) TP5(130.5,17) TP6(120.5,29.1) TP7(121,15) TP8(118.5,15) TP9(116,15) TP10(113.5,15) TP11(111,15) TP12(108.5,15) TP13(63,17) TP14(63,14.5)
  round 1.6 hole 1.02: TP22(71,25) TP22(73.5,29) TP23(73.5,25) TP24(76,25) TP25(55.6,50.3) TP26(58.1,50.3) TP27(107.1,35.1) TP28(73.5,31.5) TP29(76,31.5) TP30(78.5,31.5) TP35(60.6,50.3)

## Via types
v1: diameter 0.5, hole 0.3, Top Layer to Bottom Layer, tented both sides, 307 vias
v2: diameter 0.4, hole 0.3, Top Layer to Bottom Layer, tented both sides, 5 vias
v3: diameter 0.8, hole 0.4, Top Layer to Bottom Layer, tented both sides, 4 vias

## Nets (pads, with @x,y where several pads share a name; then routed paths per layer and width w, separated by ;. In a path a pad name is that pad's centre, name@x,y a point inside that pad or via, vN(x,y) a via of type N, cw(c..) or ccw(c..) an arc to the next point about the centre after c; other vN are vias at no path point)
3V3: C1.2 C4.2 C5.2 C6.2 C8.2 C9.2 C10.2 C11.2 C17.2 C22#1.2 C22#2.2 C23#1.2 C23#2.2 J1.10 J2.12 J4.3 J5.1 LED1.3 LED2.3 LED3.3 pad.TP7 pad.TP8 pad.TP9 R2.1 R6.1 R7.1 R8#1.1 R8#2.1 R9#1.1 R9#2.1 R12.1 R14.1 R15.1 SW1.3 U0.1 U0.13 U0.19 U0.32 U0.48 U0.64 U2.4 U3.13 U6#1.1 U6#1.11 U6#2.1 U6#2.11 | length 52.3
  Top Layer w0.2: C17.2@33.175,38.7 34.073,38.7 34.122,38.749 34.546,38.749 U3.13@35.046,39.249 ; v1(117.3,54.6) 117.315,54.585 118.345,54.585 LED1.3@118.36,54.57 ; v1(121.9,53.9) LED2.3@121.9,54.57 ; R7.1@124.4,49.875 124.419,49.875 124.7,50.156 v1(124.7,50.8) ; LED3.3@125.26,54.57 125.3,54.53 v1(125.3,53.9) ; R6.1@127.475,47.5 v1(128.4,47.5)
  Top Layer w0.254: C22#1.2@5.2,39.17 5.23,39.17 v1(5.8,38.6) 5.847,38.647 5.847,38.747 6.27,39.17 C23#1.2@6.3,39.17 7.218,39.17 U6#1.1@7.4,39.352 ; R8#1.1@7.311,45.791 7.565,46.045 7.925,46.045 8.003,46.123 8.114,46.123 v1(8.117,46.12) ; v1@8.042,46.195 8.133,46.286 8.267,46.286 8.508,46.045 8.835,46.045 R9#1.1@9.089,45.791 ; U6#1.11@9,39.352 9.123,39.229 9.123,38.949 9.272,38.8 9.336,38.8 v1(9.851,38.285) ; v1(32.493,37.8) 32.54,37.847 32.708,37.847 33.07,38.209 33.07,38.595 C17.2@33.175,38.7 ; C22#2.2@47,15.07 C23#2.2@48.135,15.07 ; v1(47.6,14.3) 47.647,14.347 47.647,14.547 48.135,15.035 C23#2.2@48.135,15.07 ; R8#2.1@49.311,21.639 49.565,21.893 49.892,21.893 50.133,22.134 v1(50.2,22.134) 50.267,22.134 50.508,21.893 50.835,21.893 R9#2.1@51.089,21.639 ; U6#2.1@49.4,15.2 49.27,15.07 C23#2.2@48.135,15.07 ; U6#2.11@51,15.2 51.1,15.1 v1(51.1,14.1) ; J5.1@59.67,19.044 59.814,18.9 60.534,18.9 60.833,19.2 v1(60.9,19.2) ; J2.12@69.3,38 70.6,38 v1(71.5,37.1) ; v1(99,50.8) 99,52.746 J4.3@99.05,52.796 ; R12.1@101.448,35.652 v1(102.249,34.851) ; R14.1@109.452,47.152 109.6,47.152 109.874,46.879 110.879,46.879 v1(110.9,46.9) 110.957,46.843 111.149,46.843 C8.2@111.596,46.396 v1(112.178,45.814) 112.759,45.233 113.038,45.233 U0.13@114.476,43.795 ; v1(111.8,51.4) 112.452,50.748 R15.1@112.452,50.648 ; C1.2@112.804,38.204 112.825,38.183 113.028,38.183 113.198,38.353 113.353,38.353 v1(113.4,38.4) 113.4,38.461 114.122,39.183 U0.19@114.122,39.216 ; v1(118,49) 118.047,48.953 118.047,48.742 118.718,48.07 U0.1@118.718,48.038 ; v1(118.511,32.789) C10.2@118.104,33.196 118.104,33.398 118.303,33.597 118.303,34.204 U0.32@118.718,34.62 ; C11.2@121.008,48.892 120.987,48.871 120.987,48.63 121.008,48.609 121.008,48.559 U0.64@121.53,48.038 122.3,48.808 C6.2@122.3,49.37 122.33,49.37 122.713,49.753 123.053,49.753 v1(123.1,49.8) ; U0.48@126.833,39.923 127.249,39.508 127.97,39.508 C5.2@127.993,39.53 127.996,39.533 127.996,40.396 v1(128,40.4) ; v1(134.3,54.1) 134.347,54.053 134.615,54.053 134.939,53.729 135.325,53.729 SW1.3@135.431,53.835
  Bottom Layer w0.2: v1(134.4,48.2) J1.10@138.5,48.2
  other v1: 107.8,19.6 108.5,19.6 109.2,19.6 109.9,19.6 110.6,19.6 108.15,20.3 108.85,20.3 109.55,20.3 110.25,20.3 107.8,21 108.5,21 109.2,21 108.15,21.7 108.85,21.7 111.65,21.7 112.35,21.7
A: pad.TP22@71,25 U0.14 U3.8 | length 147.6
  Top Layer w0.2: v1(32.1,43.4) 32.157,43.343 32.157,42.943 U3.8@33.914,41.186 ; v1(36.2,45) 36.325,45.125 36.842,45.125 36.948,45.231 ccw(c36.555,46.259) 36.976,45.242 37.135,45.308 37.313,45.32 37.634,45.641 ccw(c36.858,46.42) 37.636,45.643 37.756,45.763 ccw(c36.98,46.542) 37.759,45.766 38.08,46.087 38.08,46.237 ccw(c37.075,46.686) 38.092,46.265 38.158,46.424 38.275,46.558 38.275,47.075 39.3,48.1 88.106,48.1 89.308,49.302 93.067,49.302 93.669,48.7 99.524,48.7 103.431,44.793 112.771,44.793 U0.14@114.122,43.442
  Bottom Layer w0.2: v1(36.2,45) 33.3,45 32.1,43.8 v1(32.1,43.4) 27.6,38.9 27.6,36.8 37.3,27.1 57.75,27.1 60.25,24.6 68.7,24.6 69.1,25 pad.TP22@71,25
B: pad.TP23 U0.55 U3.10 | length 199.3
  Top Layer w0.2: v1(31.4,51) 28.8,48.4 28.8,42.6 31.8,39.6 32.71,39.6 32.952,39.843 33.804,39.843 33.866,39.904 34.001,39.904 34.194,40.097 U3.10@34.197,40.097 ; U0.55@124.712,44.856 125.756,45.9 128.878,45.9 129.4,46.422 v1(129.4,53.4)
  Bottom Layer w0.2: pad.TP23@73.5,25 73.232,24.732 72.401,24.732 71.489,23.82 70.511,23.82 70.131,24.2 59.6,24.2 58.3,25.5 48.9,25.5 48.3,26.1 35.7,26.1 25.4,36.4 25.4,45 v1(31.4,51) 34.749,54.349 87.796,54.349 88.795,53.35 129.35,53.35 v1(129.4,53.4)
CC1: U0.50 U0.57 U1.3 | length 40.9
  Top Layer w0.2: U1.3@123.432,23.899 123.382,23.949 122.751,23.949 122,24.7 122,26.8 v1@124.457,29.257 ; U0.57@124.005,45.563 124.992,46.55 128.75,46.55 v1(128.8,46.6) ; U0.50@126.48,43.088 126.523,43.088 127.235,43.8 v1(132.1,43.8)
  Bottom Layer w0.2: v1@124.457,29.257 124.625,29.257 132.181,36.814 132.181,43.533 132.157,43.556 v1@132.157,43.743 ; v1(128.8,46.6) 128.85,46.55 129.65,46.55 132.061,44.139 132.061,43.839 v1(132.1,43.8)
  other v1: 124.4,29.2
CC2: U0.35 U0.36 U1.1 | length 12.3
  Top Layer w0.2: U0.35@122.237,35.327 122.652,34.911 122.652,34.699 122.8,34.552 ; U0.36@122.59,35.68 123.006,35.265 123.006,34.757 122.8,34.552 ; v1(122.8,28.4) 122.8,34.552 ; v1(123.2,27.2) 123.432,26.968 U1.1@123.432,24.899
  Bottom Layer w0.2: v1(122.8,28.4) 123.2,28 v1(123.2,27.2)
CS: pad.TP22@73.5,29 U0.20 U3.4 | length 100.5
  Top Layer w0.2: v1(33.2,44) 33.221,44 34.316,42.905 34.457,42.905 U3.4@35.046,42.317 ; v1(109.3,39.35) 110.179,38.471 110.329,38.471 111.15,37.65 111.15,36.872 111.472,36.55 111.928,36.55 113.228,37.85 113.628,37.85 113.95,38.172 113.95,38.266 114.476,38.792 U0.20@114.476,38.862
  Bottom Layer w0.2: v1(33.2,44) 33.679,43.521 33.679,40.557 33.412,40.291 33.412,38.27 34.288,37.394 34.315,37.394 34.722,36.987 34.887,36.987 34.994,37.094 58.915,37.094 67.009,29 pad.TP22@73.5,29 98.907,29 109.257,39.35 v1(109.3,39.35)
FLT: pad.TP0@127,29 U1.11 | length 5
  Top Layer w0.2: U1.11@124.882,25.849 124.882,26.83 124.641,27.072 124.641,28.041 125.6,29 pad.TP0@127,29